# EAGLE board RAM Board Deux (EAGLE 6.6.0)
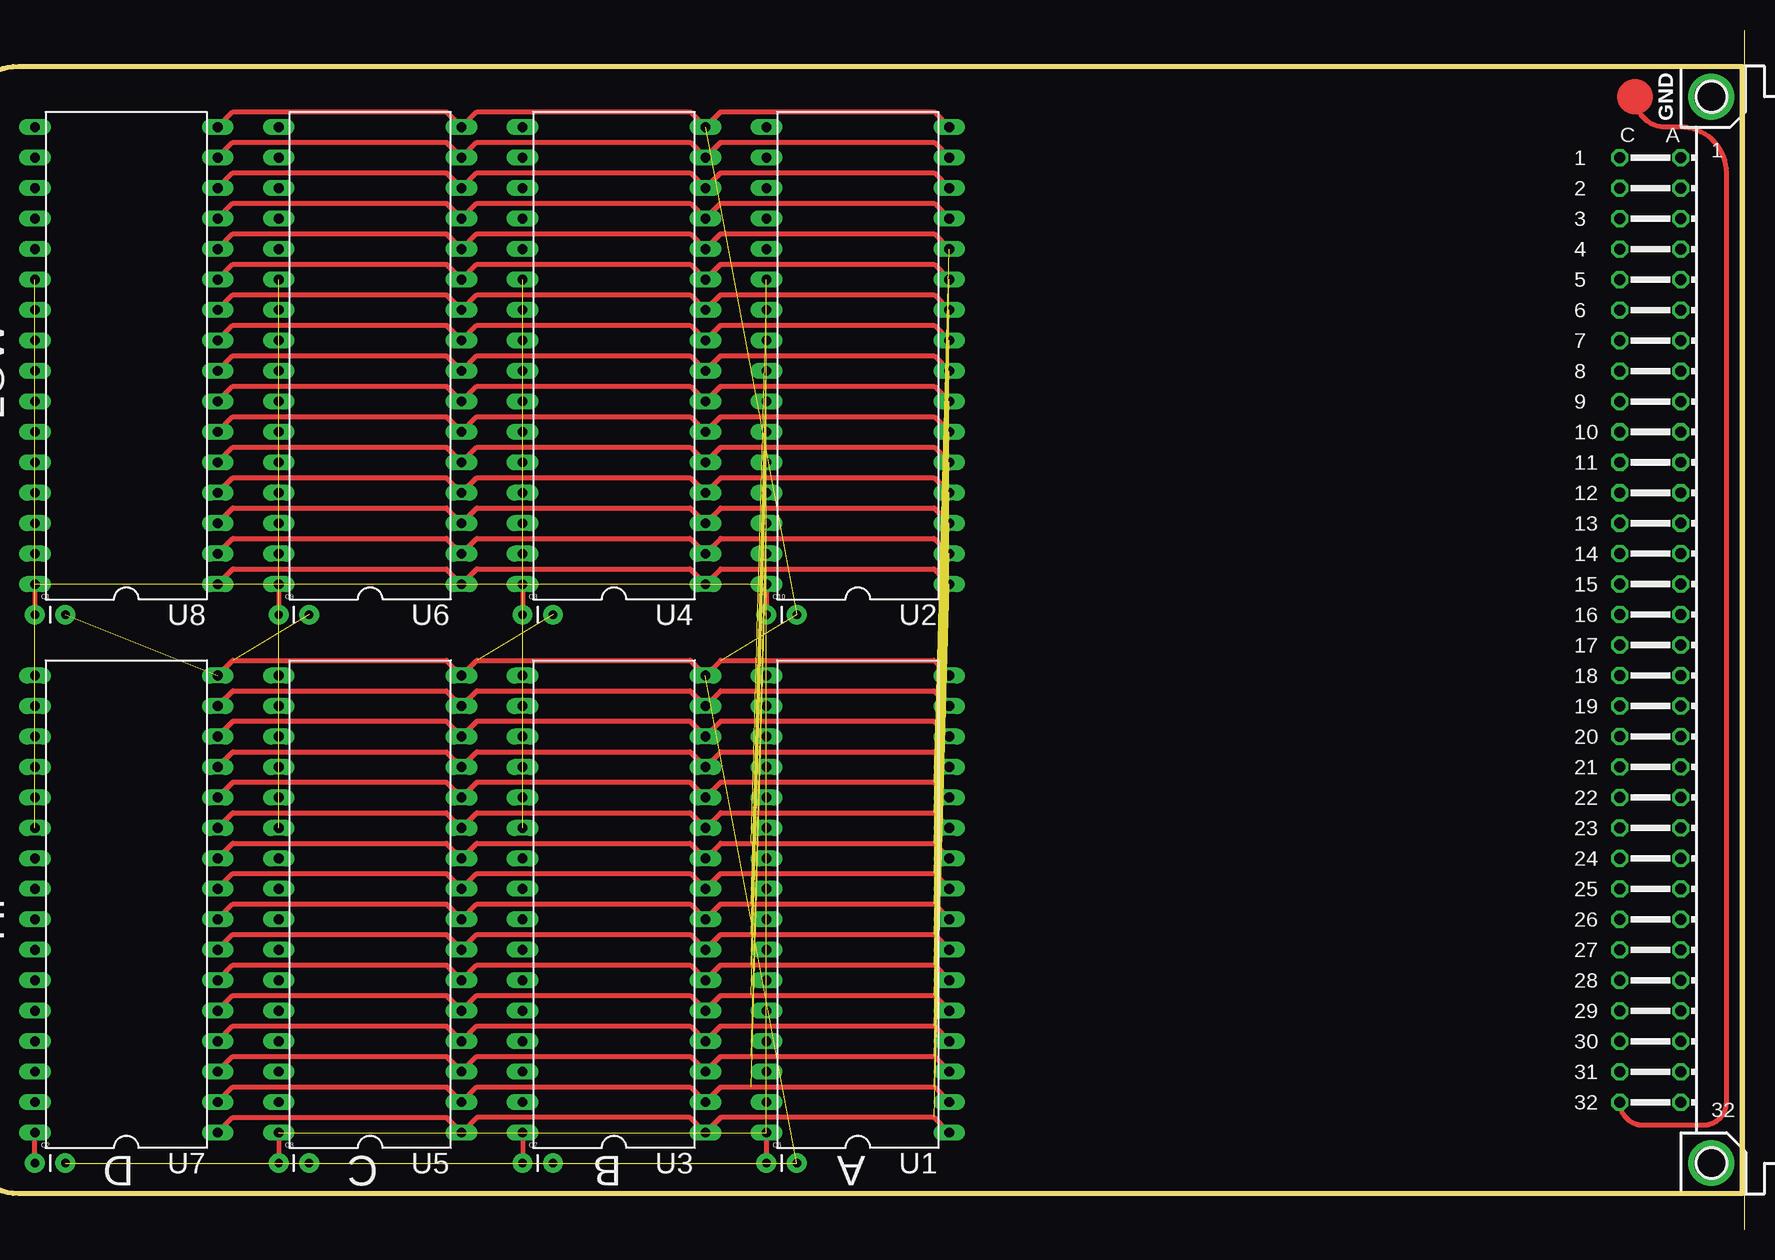
[diagram p0: board, top side]
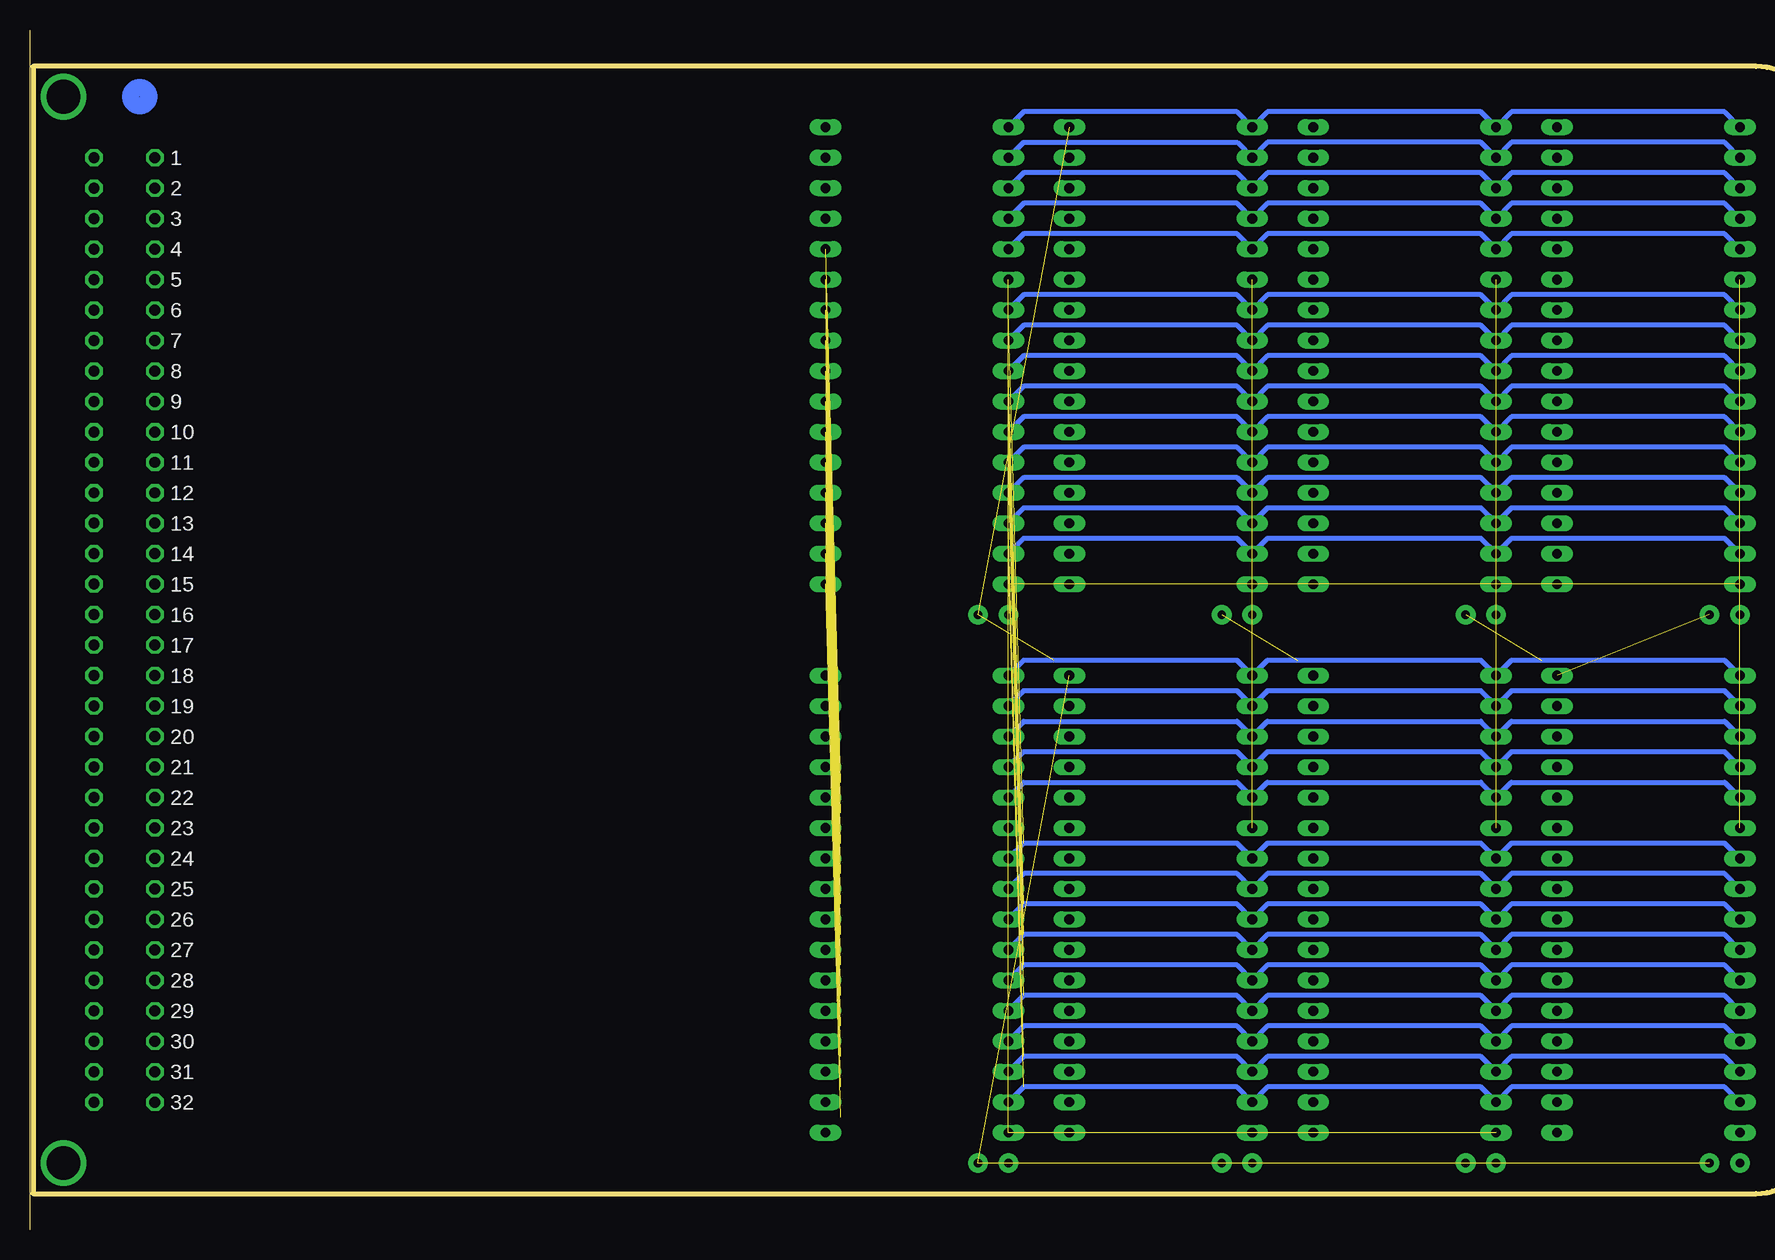
[diagram p1: board, bottom side, seen from below]

Size 0 x 100.03 mm. Coordinates in mm from the lower left corner, seen from the top.
Copper layers (1*16): Top 0.035mm / dielectric 1.5mm / Bottom 0.035mm
Design rules "default": minimum track width 10mil, minimum drill 24mil, track to track 8mil, track to pad 8mil, pad to pad 8mil, via to via 8mil, smd to smd 8mil, copper to edge 40mil, drill to drill 8mil, minimum pad ring 10mil, minimum via ring 8mil, stop-mask expansion 4mil, vias tented up to drill 0mil, thermal gap 10mil
tKeepout: area -143.8,4.3 to -141.2,9.4; area -123.4,4.3 to -120.9,8.1; area -123.4,4.3 to -120.9,9.4; area -103.1,4.3 to -100.6,9.4; area -82.8,4.3 to -80.3,9.4; area -143.8,50 to -141.2,55.1; area -123.4,50 to -120.9,55.1; area -103.1,50 to -100.6,55.1; area -82.8,50 to -80.3,55.1

## Footprints (pad centres in the part's own frame; a part is rotated, then mirrored left to right if it is on the bottom)
CAP-PTH-SMALL = drill 0.7 pad 1.651: 1 0,0; 2 2.54,0
DIL32 = drill 0.813 long: 1 -17.78,-7.62; 2 -15.24,-7.62; 3 -12.7,-7.62; 4 -10.16,-7.62; 5 -7.62,-7.62; 6 -5.08,-7.62; 7 -2.54,-7.62; 8 0,-7.62; 9 2.54,-7.62; 10 5.08,-7.62; 11 7.62,-7.62; 12 10.16,-7.62; 13 12.7,-7.62; 14 15.24,-7.62; 15 17.78,-7.62; 16 20.32,-7.62; 17 20.32,7.62; 18 17.78,7.62; 19 15.24,7.62; 20 12.7,7.62; 21 10.16,7.62; 22 7.62,7.62; 23 5.08,7.62; 24 2.54,7.62; 25 0,7.62; 26 -2.54,7.62; 27 -5.08,7.62; 28 -7.62,7.62; 29 -10.16,7.62; 30 -12.7,7.62; 31 -15.24,7.62; 32 -17.78,7.62
BLANKBOARD = drill 0.914 octagon: 3V3 71.12,39.37; 5V 76.2,36.83; 5VSB 71.12,36.83; 12V 76.2,39.37; $1 71.12,-3.81; $2 71.12,-1.27; $3 71.12,1.27; $4 71.12,3.81; $5 71.12,6.35; -12V 76.2,-39.37; /AS 71.12,-19.05; /BOOT 71.12,-8.89; /CLK 71.12,-24.13; /LDS 71.12,-16.51; /RESET 71.12,-6.35; /UDS 71.12,-13.97; /VMA 71.12,16.51; A0 71.12,-26.67; A1 71.12,-29.21; A2 71.12,-31.75; A3 71.12,-34.29; A4 71.12,-36.83; A5 76.2,-36.83; A6 76.2,-34.29; A7 76.2,-31.75; A8 76.2,-29.21; A9 76.2,-26.67; A10 76.2,-24.13; A11 76.2,-21.59; A12 76.2,-19.05; A13 76.2,-16.51; A14 76.2,-13.97; A15 76.2,-11.43; A16 76.2,-8.89; A17 76.2,-6.35; A18 76.2,-3.81; A19 76.2,-1.27; A20 76.2,1.27; A21 76.2,3.81; A22 76.2,6.35; A23 76.2,8.89; C12 71.12,11.43; C13 71.12,8.89; CLK 71.12,-21.59; D0 71.12,21.59; D1 71.12,24.13; D2 71.12,26.67; D3 71.12,29.21; D4 71.12,31.75; D5 71.12,34.29; D6 76.2,34.29; D7 76.2,31.75; D8 76.2,29.21; D9 76.2,26.67; D10 76.2,24.13; D11 76.2,21.59; D12 76.2,19.05; D13 76.2,16.51; D14 76.2,13.97; D15 76.2,11.43; E 71.12,19.05; GND 71.12,-39.37; R/W 71.12,-11.43; VPA 71.12,13.97 | drill 2.8: P$1 78.74,44.45; P$2 78.74,-44.45

## Placement (x,y rotation side)
C1  100nF  [CAP-PTH-SMALL]  -142.49,51.28 0 top  (outside the outline)
C2  100nF  [CAP-PTH-SMALL]  -142.49,5.56 0 top  (outside the outline)
C3  100nF  [CAP-PTH-SMALL]  -101.85,51.28 0 top  (outside the outline)
C6  100nF  [CAP-PTH-SMALL]  -81.53,5.56 0 top  (outside the outline)
C7  100nF  [CAP-PTH-SMALL]  -101.85,5.56 0 top  (outside the outline)
C8  100nF  [CAP-PTH-SMALL]  -122.17,5.56 0 top  (outside the outline)
C9  100nF  [CAP-PTH-SMALL]  -122.17,51.28 0 top  (outside the outline)
C10  100nF  [CAP-PTH-SMALL]  -81.53,51.28 0 top  (outside the outline)
U1  AS6C4008  [DIL32]  -73.91,25.88 90 top  (outside the outline)
U2  AS6C4008  [DIL32]  -73.91,71.6 90 top  (outside the outline)
U3  AS6C4008  [DIL32]  -94.23,25.88 90 top  (outside the outline)
U4  AS6C4008  [DIL32]  -94.23,71.6 90 top  (outside the outline)
U5  AS6C4008  [DIL32]  -114.55,25.88 90 top  (outside the outline)
U6  AS6C4008  [DIL32]  -114.55,71.6 90 top  (outside the outline)
U7  AS6C4008  [DIL32]  -134.87,25.88 90 top  (outside the outline)
U8  AS6C4008  [DIL32]  -134.87,71.6 90 top  (outside the outline)
U$1  BLANKBOARD  [BLANKBOARD]  -81.53,50.01 0 top

## Library data of the parts
C1-C3 C6-C10 = SparkFun-Capacitors
U1-U8 U$1 = Benchoff

## Nets
/AS: U$1./AS
/LDS: U$1./LDS
/UDS: U$1./UDS
ADDRESS0: U1.12 U2.12 U3.12 U4.12 U5.12 U6.12 U7.12 U8.12
ADDRESS1: U1.11 U2.11 U3.11 U4.11 U5.11 U6.11 U7.11 U8.11
ADDRESS2: U1.10 U2.10 U3.10 U4.10 U5.10 U6.10 U7.10 U8.10
ADDRESS3: U1.9 U2.9 U3.9 U4.9 U5.9 U6.9 U7.9 U8.9
ADDRESS4: U1.8 U2.8 U3.8 U4.8 U5.8 U6.8 U7.8 U8.8
ADDRESS5: U1.7 U2.7 U3.7 U4.7 U5.7 U6.7 U7.7 U8.7
ADDRESS6: U1.6 U2.6 U3.6 U4.6 U5.6 U6.6 U7.6 U8.6
ADDRESS7: U1.5 U2.5 U3.5 U4.5 U5.5 U6.5 U7.5 U8.5
ADDRESS8: U1.27 U2.27 U3.27 U4.27 U5.27 U6.27 U7.27 U8.27
ADDRESS9: U1.26 U2.26 U3.26 U4.26 U5.26 U6.26 U7.26 U8.26
ADDRESS10: U1.23 U2.23 U3.23 U4.23 U5.23 U6.23 U7.23 U8.23
ADDRESS11: U1.25 U2.25 U3.25 U4.25 U5.25 U6.25 U7.25 U8.25
ADDRESS12: U1.4 U2.4 U3.4 U4.4 U5.4 U6.4 U7.4 U8.4
ADDRESS13: U1.28 U2.28 U3.28 U4.28 U5.28 U6.28 U7.28 U8.28
ADDRESS14: U1.3 U2.3 U3.3 U4.3 U5.3 U6.3 U7.3 U8.3
ADDRESS15: U1.31 U2.31 U3.31 U4.31 U5.31 U6.31 U7.31 U8.31
ADDRESS16: U1.2 U2.2 U3.2 U4.2 U5.2 U6.2 U7.2 U8.2
ADDRESS17: U1.30 U2.30 U3.30 U4.30 U5.30 U6.30 U7.30 U8.30
ADDRESS18: U1.1 U2.1 U3.1 U4.1 U5.1 U6.1 U7.1 U8.1
ADDRESS19: U$1.A0
ADDRESS20: U$1.A1
ADDRESS21: U$1.A2
ADDRESS22: U$1.A18
ADDRESS23: U$1.A17
ADDRESS24: U$1.A16
ADDRESS25: U$1.A15
ADDRESS26: U$1.A14
ADDRESS27: U$1.A13
ADDRESS28: U$1.A12
ADDRESS29: U$1.A11
ADDRESS30: U$1.A10
ADDRESS31: U$1.A9
ADDRESS32: U$1.A8
ADDRESS33: U$1.A7
ADDRESS34: U$1.A6
ADDRESS35: U$1.A5
ADDRESS36: U$1.A4
ADDRESS37: U$1.A3
ADDRESS38: U$1.A20
ADDRESS39: U$1.A21
BANKACS: U1.22 U2.22
BANKBCS: U3.22 U4.22
BANKCCS: U5.22 U6.22
BANKDCS: U7.22 U8.22
DATA0: U2.13 U4.13 U6.13 U8.13
DATA1: U2.14 U4.14 U6.14 U8.14
DATA2: U2.15 U4.15 U6.15 U8.15
DATA3: U2.17 U4.17 U6.17 U8.17
DATA4: U2.18 U4.18 U6.18 U8.18
DATA5: U2.19 U4.19 U6.19 U8.19
DATA6: U2.20 U4.20 U6.20 U8.20
DATA7: U2.21 U4.21 U6.21 U8.21
DATA8: U1.13 U3.13 U5.13 U7.13
DATA9: U1.14 U3.14 U5.14 U7.14
DATA10: U1.15 U3.15 U5.15 U7.15
DATA11: U1.17 U3.17 U5.17 U7.17
DATA12: U1.18 U3.18 U5.18 U7.18
DATA13: U1.19 U3.19 U5.19 U7.19
DATA14: U1.20 U3.20 U5.20 U7.20
DATA15: U1.21 U3.21 U5.21 U7.21
DATA16: U$1.D0
DATA17: U$1.D1
DATA18: U$1.D2
DATA19: U$1.D3
DATA20: U$1.D4
DATA21: U$1.D5
DATA22: U$1.D6
DATA23: U$1.D7
DATA24: U$1.D8
DATA25: U$1.D9
DATA26: U$1.D10
DATA27: U$1.D11
DATA28: U$1.D12
DATA29: U$1.D13
DATA30: U$1.D14
DATA31: U$1.D15
GND: C1.2 C2.2 C3.2 C6.2 C7.2 C8.2 C9.2 C10.2 U1.16 U2.16 U3.16 U4.16 U5.16 U6.16 U7.16 U8.16
GND1: U$1.GND
R/W: U$1.R/W
READHI: U1.24 U3.24 U5.24 U7.24
READLO: U2.24 U4.24 U6.24 U8.24
S$1: C2.1 U7.32
VCC: C1.1 C3.1 C6.1 C7.1 C8.1 C9.1 C10.1 U1.32 U2.32 U3.32 U4.32 U5.32 U6.32 U8.32
VCC1: U$1.5V
WRITEHI: U1.29 U3.29 U5.29 U7.29
WRITELO: U2.29 U4.29 U6.29 U8.29

## Tracks (layer width: path | path; a pad name or v marks a point on that pad's centre or on a via)
ADDRESS0  (1 unrouted)
  Top 0.406: U8.12 -125.98,83.03 -108.2,83.03 U6.12 -105.66,83.03 -87.88,83.03 U4.12 -85.34,83.03 -67.56,83.03 U2.12 | U1.12 -67.56,37.31 -85.34,37.31 U3.12 -87.88,37.31 -105.66,37.31 U5.12 -108.2,37.31 -125.98,37.31 U7.12
ADDRESS1  (1 unrouted)
  Top 0.406: U8.11 -125.98,80.49 -108.2,80.49 U6.11 -105.66,80.49 -87.88,80.49 U4.11 -85.34,80.49 -67.56,80.49 U2.11 | U7.11 -125.98,34.77 -108.2,34.77 U5.11 -105.66,34.77 -87.88,34.77 U3.11 -85.34,34.77 -67.56,34.77 U1.11
ADDRESS2  (1 unrouted)
  Top 0.406: U8.10 -125.98,77.95 -108.2,77.95 U6.10 -105.66,77.95 -87.88,77.95 U4.10 -85.34,77.95 -67.56,77.95 U2.10 | U7.10 -125.98,32.23 -108.2,32.23 U5.10 -105.66,32.23 -87.88,32.23 U3.10 -85.34,32.23 -67.56,32.23 U1.10
ADDRESS3  (1 unrouted)
  Top 0.406: U8.9 -125.98,75.41 -108.2,75.41 U6.9 -105.66,75.41 -87.88,75.41 U4.9 -85.34,75.41 -67.56,75.41 U2.9 | U7.9 -125.98,29.69 -108.2,29.69 U5.9 -105.66,29.69 -87.88,29.69 U3.9 -85.34,29.69 -67.56,29.69 U1.9
ADDRESS4  (1 unrouted)
  Top 0.406: U8.8 -125.98,72.87 -108.2,72.87 U6.8 -105.66,72.87 -87.88,72.87 U4.8 -85.34,72.87 -67.56,72.87 U2.8 | U7.8 -125.98,27.15 -108.2,27.15 U5.8 -105.66,27.15 -87.88,27.15 U3.8 -85.34,27.15 -67.56,27.15 U1.8
ADDRESS5  (1 unrouted)
  Top 0.406: U8.7 -125.98,70.33 -108.2,70.33 U6.7 -105.66,70.33 -87.88,70.33 U4.7 -85.34,70.33 -67.56,70.33 U2.7 | U7.7 -125.98,24.61 -108.2,24.61 U5.7 -105.66,24.61 -87.88,24.61 U3.7 -85.34,24.61 -67.56,24.61 U1.7
ADDRESS6  (1 unrouted)
  Top 0.406: U8.6 -125.98,67.79 -108.2,67.79 U6.6 -105.66,67.79 -87.88,67.79 U4.6 -85.34,67.79 -67.56,67.79 U2.6 | U7.6 -125.98,22.07 -108.2,22.07 U5.6 -105.66,22.07 -87.88,22.07 U3.6 -85.34,22.07 -67.56,22.07 U1.6
ADDRESS7  (1 unrouted)
  Top 0.406: U8.5 -125.98,65.25 -108.2,65.25 U6.5 -105.66,65.25 -87.88,65.25 U4.5 -85.34,65.25 -67.56,65.25 U2.5 | U7.5 -125.98,19.53 -108.2,19.53 U5.5 -105.66,19.53 -87.88,19.53 U3.5 -85.34,19.53 -67.56,19.53 U1.5
ADDRESS8  (1 unrouted)
  Bottom 0.406: U8.27 -141.22,67.79 -123.44,67.79 U6.27 -120.9,67.79 -103.12,67.79 U4.27 -100.58,67.79 -82.8,67.79 U2.27 | U7.27 -141.22,22.07 -123.44,22.07 U5.27 -120.9,22.07 -103.12,22.07 U3.27 -100.58,22.07 -82.8,22.07 U1.27
ADDRESS9  (1 unrouted)
  Bottom 0.406: U8.26 -141.22,70.33 -123.44,70.33 U6.26 -120.9,70.33 -103.12,70.33 U4.26 -100.58,70.33 -82.8,70.33 U2.26 | U7.26 -141.22,24.61 -123.44,24.61 U5.26 -120.9,24.61 -103.12,24.61 U3.26 -100.58,24.61 -82.8,24.61 U1.26
ADDRESS10  (1 unrouted)
  Bottom 0.406: U8.23 -141.22,77.95 -123.44,77.95 U6.23 -120.9,77.95 -103.12,77.95 U4.23 -100.58,77.95 -82.8,77.95 U2.23 | U7.23 -141.22,32.23 -123.44,32.23 U5.23 -120.9,32.23 -103.12,32.23 U3.23 -100.58,32.23 -82.8,32.23 U1.23
ADDRESS11  (1 unrouted)
  Bottom 0.406: U8.25 -141.22,72.87 -123.44,72.87 U6.25 -120.9,72.87 -103.12,72.87 U4.25 -100.58,72.87 -82.8,72.87 U2.25 | U7.25 -141.22,27.15 -123.44,27.15 U5.25 -120.9,27.15 -103.12,27.15 U3.25 -100.58,27.15 -82.8,27.15 U1.25
ADDRESS12  (1 unrouted)
  Top 0.406: U8.4 -125.98,62.71 -108.2,62.71 U6.4 -105.66,62.71 -87.88,62.71 U4.4 -85.34,62.71 -67.56,62.71 U2.4 | U7.4 -125.98,16.99 -108.2,16.99 U5.4 -105.66,16.99 -87.88,16.99 U3.4 -85.34,16.99 -67.56,16.99 U1.4
ADDRESS13  (1 unrouted)
  Bottom 0.406: U8.28 -141.22,65.25 -123.44,65.25 U6.28 -120.9,65.25 -103.12,65.25 U4.28 -100.58,65.25 -82.8,65.25 U2.28 | U7.28 -141.22,19.53 -123.44,19.53 U5.28 -120.9,19.53 -103.12,19.53 U3.28 -100.58,19.53 -82.8,19.53 U1.28
ADDRESS14  (1 unrouted)
  Top 0.406: U8.3 -125.98,60.17 -108.2,60.17 U6.3 -105.66,60.17 -87.88,60.17 U4.3 -85.34,60.17 -67.56,60.17 U2.3 | U7.3 -125.98,14.45 -108.2,14.45 U5.3 -105.66,14.45 -87.88,14.45 U3.3 -85.34,14.45 -67.56,14.45 U1.3
ADDRESS15  (1 unrouted)
  Bottom 0.406: U8.31 -141.22,57.63 -123.44,57.63 U6.31 -120.9,57.63 -103.12,57.63 U4.31 -100.58,57.63 -82.8,57.63 U2.31 | U7.31 -141.22,11.91 -123.44,11.91 U5.31 -120.9,11.91 -103.12,11.91 U3.31 -100.58,11.91 -82.8,11.91 U1.31
ADDRESS16  (1 unrouted)
  Top 0.406: U8.2 -125.98,57.63 -108.2,57.63 U6.2 -105.66,57.63 -87.88,57.63 U4.2 -85.34,57.63 -67.56,57.63 U2.2 | U7.2 -125.98,11.91 -108.2,11.91 U5.2 -105.66,11.91 -87.88,11.91 U3.2 -85.34,11.91 -67.56,11.91 U1.2
ADDRESS17  (1 unrouted)
  Bottom 0.406: U8.30 -141.22,60.17 -123.44,60.17 U6.30 -120.9,60.17 -103.12,60.17 U4.30 -100.58,60.17 -82.8,60.17 U2.30 | U7.30 -141.22,14.45 -123.44,14.45 U5.30 -120.9,14.45 -103.12,14.45 U3.30 -100.58,14.45 -82.8,14.45 U1.30
ADDRESS18  (1 unrouted)
  Top 0.406: U8.1 -125.98,55.09 -108.2,55.09 U6.1 -105.66,55.09 -87.88,55.09 U4.1 -85.34,55.09 -67.56,55.09 U2.1 | U7.1 -125.98,9.37 -108.2,9.37 U5.1 -105.66,9.37 -87.88,9.37 U3.1 -85.34,9.37 -67.56,9.37 U1.1
BANKACS  (1 unrouted)
BANKBCS  (1 unrouted)
BANKCCS  (1 unrouted)
BANKDCS  (1 unrouted)
DATA0
  Top 0.406: U8.13 -125.98,85.57 -108.2,85.57 U6.13 -105.66,85.57 -87.88,85.57 U4.13 -85.34,85.57 -67.56,85.57 U2.13
DATA1
  Top 0.406: U8.14 -125.98,88.11 -108.2,88.11 U6.14 -105.66,88.11 -87.88,88.11 U4.14 -85.34,88.11 -67.56,88.11 U2.14
DATA2
  Top 0.406: U8.15 -125.98,90.65 -108.2,90.65 U6.15 -105.66,90.65 -87.88,90.65 U4.15 -85.34,90.65 -67.56,90.65 U2.15
DATA3
  Bottom 0.406: U8.17 -141.22,93.19 -123.44,93.19 U6.17 -120.9,93.19 -103.12,93.19 U4.17 -100.58,93.19 -82.8,93.19 U2.17
DATA4
  Bottom 0.406: U8.18 -141.22,90.65 -123.44,90.65 U6.18 -120.9,90.65 -103.12,90.65 U4.18 -100.58,90.65 -82.8,90.65 U2.18
DATA5
  Bottom 0.406: U8.19 -141.22,88.11 -123.44,88.11 U6.19 -120.9,88.11 -103.12,88.11 U4.19 -100.58,88.11 -82.8,88.11 U2.19
DATA6
  Bottom 0.406: U8.20 -141.22,85.57 -123.44,85.57 U6.20 -120.9,85.57 -103.12,85.57 U4.20 -100.58,85.57 -82.8,85.57 U2.20
DATA7
  Bottom 0.406: U8.21 -141.22,83.03 -123.44,83.03 U6.21 -120.9,83.03 -103.12,83.03 U4.21 -100.58,83.03 -82.8,83.03 U2.21
DATA8
  Top 0.406: U7.13 -125.98,39.85 -108.2,39.85 U5.13 -105.66,39.85 -87.88,39.85 U3.13 -85.34,39.85 -67.56,39.85 U1.13
DATA9
  Top 0.406: U1.14 -67.56,42.39 -85.34,42.39 U3.14 -87.88,42.39 -105.66,42.39 U5.14 -108.2,42.39 -125.98,42.39 U7.14
DATA10
  Top 0.406: U7.15 -125.98,44.93 -108.2,44.93 U5.15 -105.66,44.93 -87.88,44.93 U3.15 -85.34,44.93 -67.56,44.93 U1.15
DATA11
  Bottom 0.406: U7.17 -141.22,47.47 -123.44,47.47 U5.17 -120.9,47.47 -103.12,47.47 U3.17 -100.58,47.47 -82.8,47.47 U1.17
DATA12
  Bottom 0.406: U7.18 -141.22,44.93 -123.44,44.93 U5.18 -120.9,44.93 -103.12,44.93 U3.18 -100.58,44.93 -82.8,44.93 U1.18
DATA13
  Bottom 0.406: U1.19 -82.8,42.39 -100.58,42.39 U3.19 -103.12,42.39 -120.9,42.39 U5.19 -123.44,42.39 -141.22,42.39 U7.19
DATA14
  Bottom 0.406: U7.20 -141.22,39.85 -123.44,39.85 U5.20 -120.9,39.85 -103.12,39.85 U3.20 -100.58,39.85 -82.8,39.85 U1.20
DATA15
  Bottom 0.406: U1.21 -82.8,37.31 -100.58,37.31 U3.21 -103.12,37.31 -120.9,37.31 U5.21 -123.44,37.31 -141.22,37.31 U7.21
GND  (9 unrouted)
  Top 0.406: U8.16 -125.98,93.19 -108.2,93.19 U6.16 -105.66,93.19 -87.88,93.19 U4.16 -85.34,93.19 -67.56,93.19 U2.16 | U7.16 -125.98,47.47 -108.2,47.47 U5.16 -105.66,47.47 -87.88,47.47 U3.16 -85.34,47.47 -67.56,47.47 U1.16
READHI
  Bottom 0.406: U7.24 -141.22,29.69 -123.44,29.69 U5.24 -120.9,29.69 -103.12,29.69 U3.24 -100.58,29.69 -82.8,29.69 U1.24
READLO
  Bottom 0.406: U8.24 -141.22,75.41 -123.44,75.41 U6.24 -120.9,75.41 -103.12,75.41 U4.24 -100.58,75.41 -82.8,75.41 U2.24
S$1
  Top 0.406: C2.1 U7.32
VCC  (6 unrouted)
  Top 0.406: U8.32 C1.1 | U6.32 C9.1 | U4.32 C3.1 | U2.32 C10.1 | U5.32 C8.1 | U3.32 C7.1 | U1.32 C6.1
WRITEHI
  Bottom 0.406: U7.29 -141.22,16.99 -123.44,16.99 U5.29 -120.9,16.99 -103.12,16.99 U3.29 -100.58,16.99 -82.8,16.99 U1.29
WRITELO
  Bottom 0.406: U8.29 -141.22,62.71 -123.44,62.71 U6.29 -120.9,62.71 -103.12,62.71 U4.29 -100.58,62.71 -82.8,62.71 U2.29

## Text on the board
tPlace: LOW | HI | D | C | B | A